# EAGLE board Bio-belt_SMD (EAGLE 5.06)
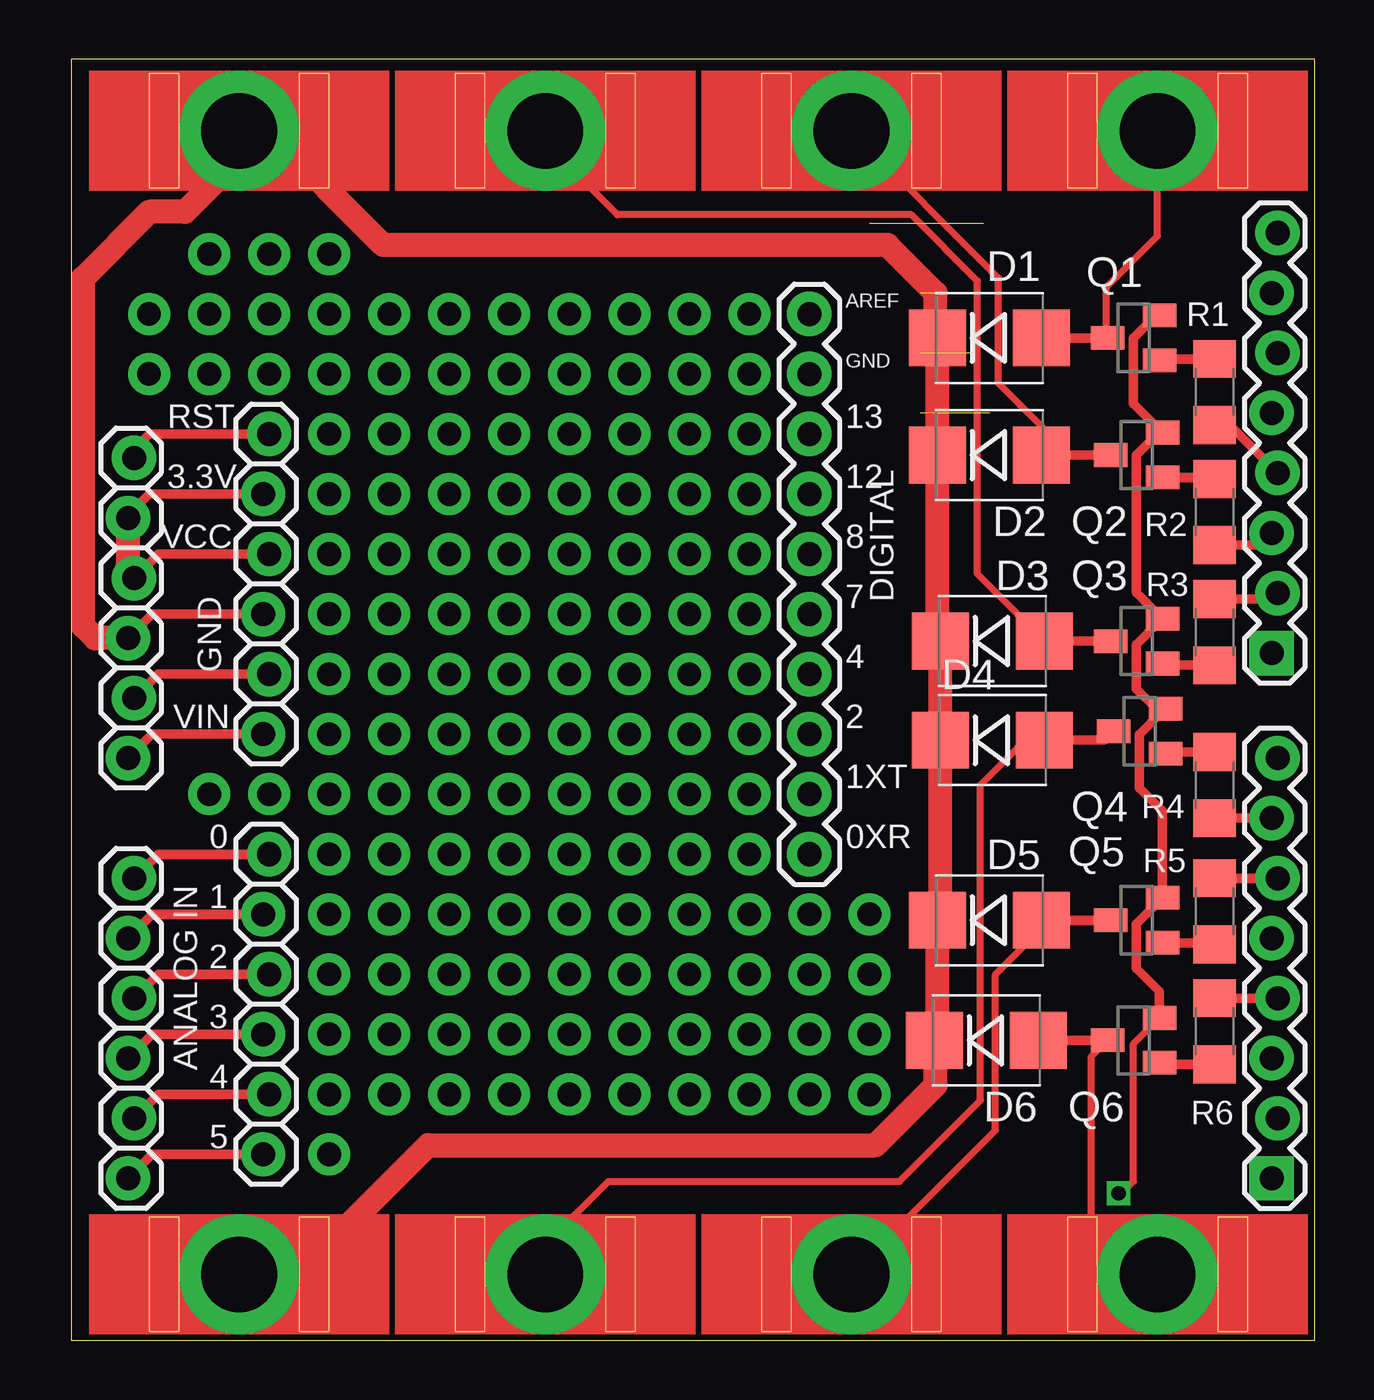
[diagram p0: board, top side]
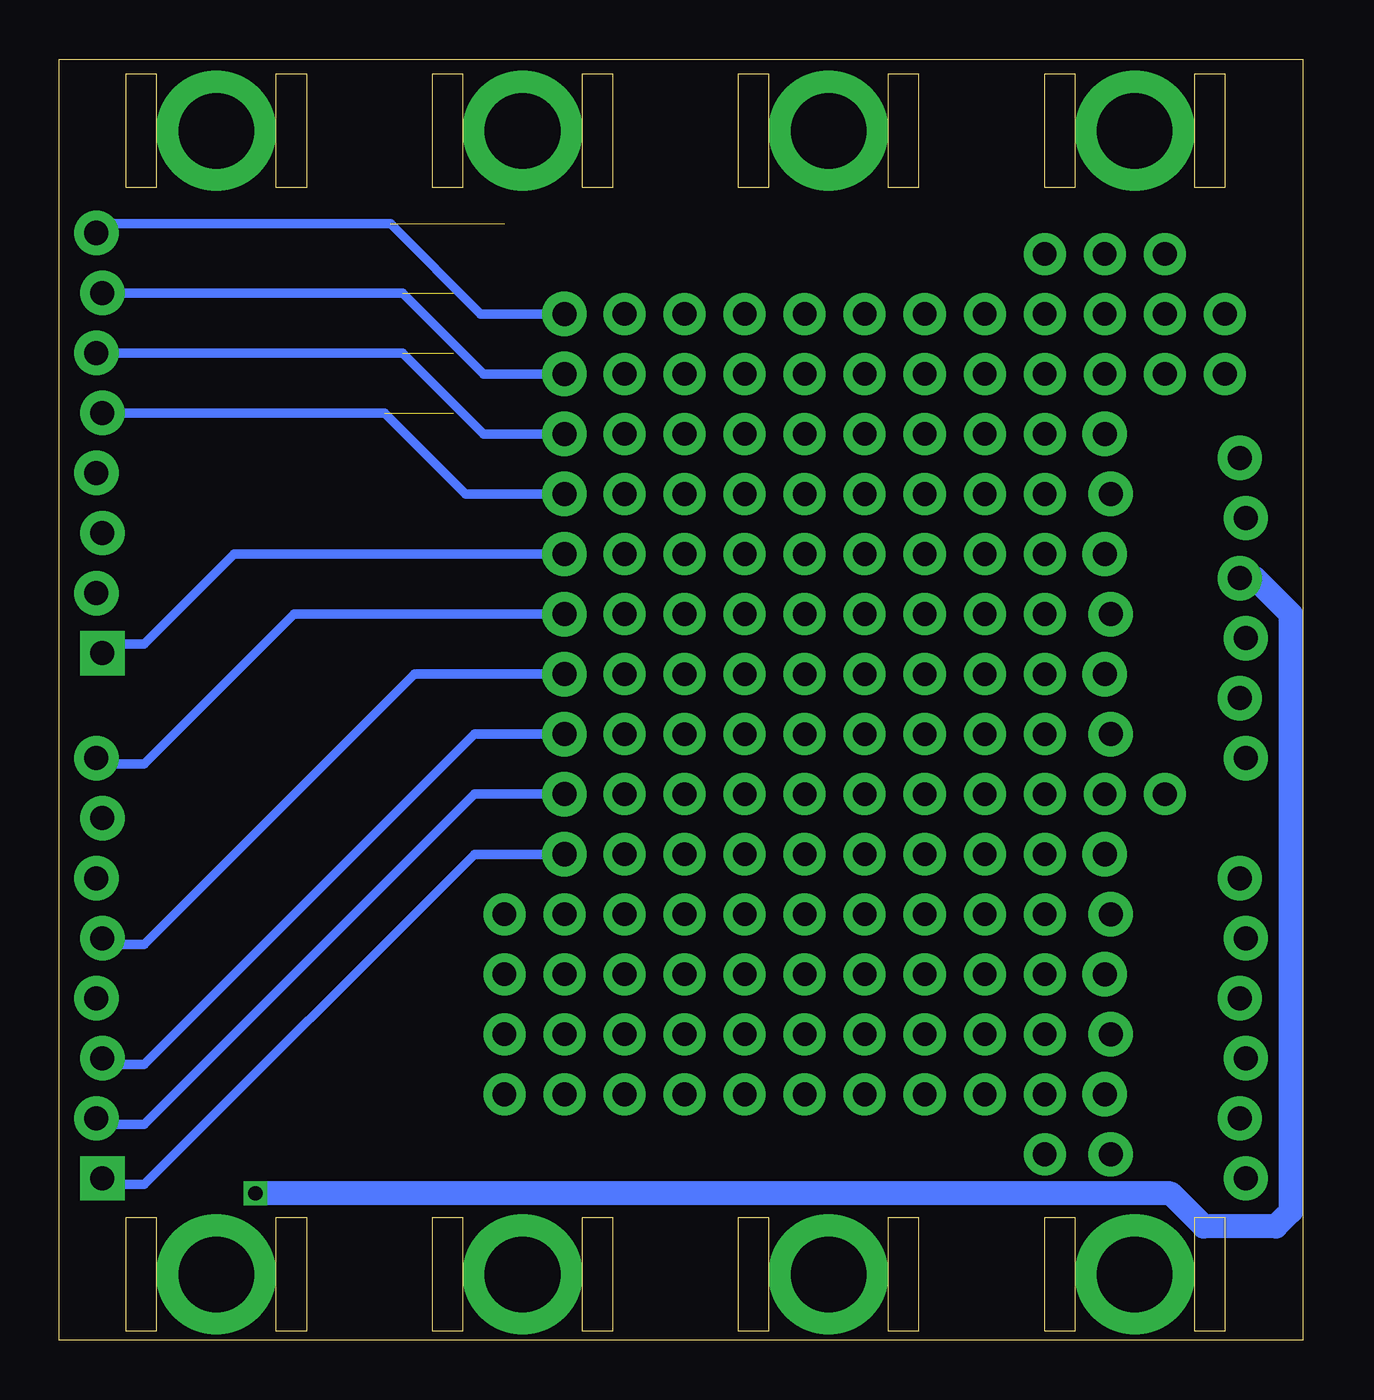
[diagram p1: board, bottom side, seen from below]

Size 52.63 x 54.22 mm. Coordinates in mm from the lower left corner, seen from the top.
Outline: 0,0 52.63,0 52.63,54.22 0,54.22 0,0
Copper layers (1*16): Top 0.035mm / dielectric 1.5mm / Bottom 0.035mm
Design rules "default": minimum track width 10mil, minimum drill 24mil, track to track 8mil, track to pad 8mil, pad to pad 8mil, via to via 8mil, smd to smd 8mil, copper to edge 40mil, drill to drill 8mil, minimum pad ring 10mil, minimum via ring 8mil, stop-mask expansion 4mil, vias tented up to drill 0mil, thermal gap 10mil

## Footprints (pad centres in the part's own frame; a part is rotated, then mirrored left to right if it is on the bottom)
SMB-DIODE = smd 2.4 x 2.4: A 2.2,0; C -2.2,0
1X06_LOCK = drill 1.016 pad 1.88 round: 1 0,0; 2 2.54,-0.254; 3 5.08,0; 4 7.62,-0.254; 5 10.16,0; 6 12.7,-0.254
1X10 = drill 1.016 pad 1.88 round: 1 0,0; 2 2.54,0; 3 5.08,0; 4 7.62,0; 5 10.16,0; 6 12.7,0; 7 15.24,0; 8 17.78,0; 9 20.32,0; 10 22.86,0
1X08_LOCK = drill 1.016 pad 1.88 square: 1 0,0.127 | drill 1.016 pad 1.88 round: 2 2.54,-0.127; 3 5.08,0.127; 4 7.62,-0.127; 5 10.16,0.127; 6 12.7,-0.127; 7 15.24,0.127; 8 17.78,-0.127
SOT23 = smd 1 x 1.4: 1 -0.95,-1.1; 2 0.95,-1.1; 3 0,1.1
1206 = smd 1.6 x 1.8: 1 -1.4,0; 2 1.4,0
SN1X01 = drill 3.2 pad 5.08 round: P$5 0,0

## Placement (x,y rotation side)
D1  [SMB-DIODE]  38.86,42.42 0 top
D2  [SMB-DIODE]  38.86,37.47 0 top
D3  [SMB-DIODE]  38.99,29.59 0 top
D4  [SMB-DIODE]  38.99,25.4 0 top
D5  [SMB-DIODE]  38.86,17.78 0 top
D6  [SMB-DIODE]  38.73,12.7 0 top
JP1  [1X06_LOCK]  8.38,38.35 270 top
JP2  M10"  [1X10]  31.24,20.57 90 top
JP3  [1X06_LOCK]  2.67,37.34 270 top
JP4  [1X06_LOCK]  2.67,19.56 270 top
JP5  [1X08_LOCK]  50.93,29.08 90 top
JP6  [1X08_LOCK]  50.93,6.86 90 top
JP7  [1X06_LOCK]  8.38,20.57 270 top
Q1  [SOT23]  44.96,42.42 90 top
Q2  [SOT23]  45.09,37.47 90 top
Q3  [SOT23]  45.09,29.59 90 top
Q4  [SOT23]  45.21,25.78 90 top
Q5  [SOT23]  45.09,17.78 90 top
Q6  [SOT23]  44.96,12.7 90 top
R1  [1206]  48.39,40.13 90 top
R2  [1206]  48.39,35.05 90 top
R3  [1206]  48.39,29.97 270 top
R4  [1206]  48.39,23.5 90 top
R5  [1206]  48.39,18.16 270 top
R6  [1206]  48.39,13.08 270 top
U$1  10MM_MAG_SNAP  [SN1X01]  45.97,51.18 90 top
U$2  10MM_MAG_SNAP  [SN1X01]  33.02,51.18 90 top
U$3  10MM_MAG_SNAP  [SN1X01]  20.07,51.18 90 top
U$4  10MM_MAG_SNAP  [SN1X01]  20.07,2.79 90 top
U$5  10MM_MAG_SNAP  [SN1X01]  33.02,2.79 90 top
U$6  10MM_MAG_SNAP  [SN1X01]  45.97,2.79 90 top
U$7  10MM_MAG_SNAP  [SN1X01]  7.11,2.79 90 top
U$8  10MM_MAG_SNAP  [SN1X01]  7.11,51.18 90 top
U$9  [SHOCK_LOGO]  46.48,35.31 0 bottom
U$10  [PS1_LOGO]  47.24,24.13 0 bottom

## Library data of the parts
D1-D6 JP1-JP7 R1-R6 U$1-U$8 = SparkFun
Q1-Q6 = semicon-smd-ipc
U$9 U$10 = PumpingStation-One

## Nets
GND: JP1.2 JP1.3 JP3.2 JP3.3 Q1.2 Q2.2 Q3.2 Q4.2 Q5.2 Q6.2
N$1: D1.A Q1.3 U$1.P$5
N$2: D2.A Q2.3 U$2.P$5
N$3: D3.A Q3.3 U$3.P$5
N$4: D4.A Q4.3 U$4.P$5
N$5: D5.A Q5.3 U$5.P$5
N$6: D6.A Q6.3 U$6.P$5
N$8: Q1.1 R1.2
N$9: Q2.1 R2.2
N$10: Q3.1 R3.2
N$11: Q4.1 R4.2
N$12: Q5.1 R5.2
N$13: Q6.1 R6.2
N$14: JP5.4 R1.1
N$15: JP5.3 R2.1
N$16: JP5.2 R3.1
N$17: JP6.7 R4.1
N$18: JP6.6 R5.1
N$19: JP6.4 R6.1
N$179: JP2.10 JP5.8
N$180: JP2.9 JP5.7
N$181: JP2.8 JP5.6
N$182: JP2.7 JP5.5
N$183: JP2.6 JP5.1
N$184: JP2.5 JP6.8
N$185: JP2.4 JP6.5
N$191: JP2.3 JP6.3
N$192: JP2.2 JP6.2
N$193: JP2.1 JP6.1
N$194: JP1.6 JP3.6
N$195: JP1.5 JP3.5
N$196: JP1.1 JP3.1
N$197: JP4.6 JP7.6
N$198: JP4.5 JP7.5
N$199: JP4.4 JP7.4
N$200: JP4.3 JP7.3
N$201: JP4.2 JP7.2
N$202: JP4.1 JP7.1
VCC: D1.C D2.C D3.C D4.C D5.C D6.C JP1.4 JP3.4 U$7.P$5 U$8.P$5

## Tracks (layer width: path | path; a pad name or v marks a point on that pad's centre or on a via)
GND  (via drill 0.6)
  Top 0.305: v44.32,6.22 44.45,6.22 44.96,6.73 44.96,12.55 Q6.2
  Top 0.406: Q6.2 46.06,14.78 45.09,15.75 45.09,17.63 Q5.2 46.19,22.39 45.21,23.37 45.21,25.63 Q4.2 45.91,26.73 45.09,27.56 45.09,29.44 Q3.2 45.09,31.64 45.09,37.47 46.03,38.41 Q2.2 44.96,39.64 44.96,42.42 45.91,43.37 Q1.2 | JP3.2 2.41,34.92 3.3,35.81 JP1.2 | JP1.3 3.68,33.27 JP3.3
  Top 1.016: JP3.2 2.41,32.51 JP3.3
  Bottom 1.016: JP3.3 2.03,32.26 0.51,30.73 0.51,5.46 1.14,4.83 4.19,4.83 5.59,6.22 v44.32,6.22
N$1
  Top 0.305: U$1.P$5 45.97,46.74 43.81,44.58 43.81,42.46 Q1.3
  Top 0.406: D1.A Q1.3
N$2
  Top 0.305: D2.A 41.06,38.69 39.24,40.51 39.24,44.96 U$2.P$5
  Top 0.406: D2.A Q2.3
N$3
  Top 0.305: U$3.P$5 20.07,50.67 23.11,47.62 35.56,47.62 38.35,44.83 38.35,32.43 D3.A
  Top 0.406: D3.A Q3.3
N$4
  Top 0.305: D4.A 40.39,25.4 38.48,23.5 38.48,10.16 35.05,6.73 22.73,6.73 20.07,4.06 U$4.P$5
  Top 0.406: D4.A 43.73,25.4 Q4.3
N$5
  Top 0.305: D5.A 41.06,17.44 39.12,15.49 39.12,8.89 U$5.P$5
  Top 0.406: D5.A Q5.3
N$6
  Top 0.305: U$6.P$5 44.7,2.79 43.18,4.32 43.18,12.02 Q6.3
  Top 0.406: Q6.3 D6.A
N$8
  Top 0.406: R1.2 46.12,41.53 Q1.1
N$9
  Top 0.406: Q2.1 48.32,36.52 R2.2
N$10
  Top 0.406: R3.2 46.25,28.57 Q3.1
N$11
  Top 0.406: R4.2 46.38,24.89 Q4.1
N$12
  Top 0.406: Q5.1 48.32,16.83 R5.2
N$13
  Top 0.406: R6.2 46.13,11.68 Q6.1
N$14
  Top 0.406: R1.1 49.02,38.73 JP5.4
N$15
  Top 0.406: R2.1 50.29,33.65 JP5.3
N$16
  Top 0.406: R3.1 50.8,31.37 JP5.2
N$17
  Top 0.406: JP6.7 R4.1
N$18
  Top 0.406: JP6.6 R5.1
N$19
  Top 0.406: JP6.4 R6.1
N$20  (via drill 1 pad 1.78)
  other vias: 8.38,43.43
N$21  (via drill 1 pad 1.78)
  other vias: 10.92,43.43
N$25  (via drill 1 pad 1.78)
  other vias: 5.84,23.11
N$33  (via drill 1 pad 1.78)
  other vias: 10.92,7.87
N$34  (via drill 1 pad 1.78)
  other vias: 5.84,40.89
N$35  (via drill 1 pad 1.78)
  other vias: 3.3,40.89
N$36  (via drill 1 pad 1.78)
  other vias: 3.3,43.43
N$37  (via drill 1 pad 1.78)
  other vias: 5.84,43.43
N$38  (via drill 1 pad 1.78)
  other vias: 5.84,45.97
N$45  (via drill 1 pad 1.78)
  other vias: 8.38,23.11
N$51  (via drill 1 pad 1.78)
  other vias: 8.38,40.89
N$52  (via drill 1 pad 1.78)
  other vias: 8.38,45.97
N$53  (via drill 1 pad 1.78)
  other vias: 10.92,38.35
N$54  (via drill 1 pad 1.78)
  other vias: 10.92,35.81
N$55  (via drill 1 pad 1.78)
  other vias: 10.92,33.27
N$56  (via drill 1 pad 1.78)
  other vias: 10.92,30.73
N$57  (via drill 1 pad 1.78)
  other vias: 10.92,28.19
N$58  (via drill 1 pad 1.78)
  other vias: 10.92,25.65
N$59  (via drill 1 pad 1.78)
  other vias: 10.92,23.11
N$60  (via drill 1 pad 1.78)
  other vias: 10.92,20.57
N$61  (via drill 1 pad 1.78)
  other vias: 10.92,18.03
N$62  (via drill 1 pad 1.78)
  other vias: 10.92,15.49
N$63  (via drill 1 pad 1.78)
  other vias: 10.92,12.95
N$64  (via drill 1 pad 1.78)
  other vias: 10.92,10.41
N$65  (via drill 1 pad 1.78)
  other vias: 10.92,40.89
N$66  (via drill 1 pad 1.78)
  other vias: 10.92,45.97
N$67  (via drill 1 pad 1.78)
  other vias: 13.46,38.35
N$68  (via drill 1 pad 1.78)
  other vias: 13.46,35.81
N$69  (via drill 1 pad 1.78)
  other vias: 13.46,33.27
N$70  (via drill 1 pad 1.78)
  other vias: 13.46,30.73
N$71  (via drill 1 pad 1.78)
  other vias: 13.46,28.19
N$72  (via drill 1 pad 1.78)
  other vias: 13.46,25.65
N$73  (via drill 1 pad 1.78)
  other vias: 13.46,23.11
N$74  (via drill 1 pad 1.78)
  other vias: 13.46,20.57
N$75  (via drill 1 pad 1.78)
  other vias: 13.46,18.03
N$76  (via drill 1 pad 1.78)
  other vias: 13.46,15.49
N$77  (via drill 1 pad 1.78)
  other vias: 13.46,12.95
N$78  (via drill 1 pad 1.78)
  other vias: 13.46,10.41
N$79  (via drill 1 pad 1.78)
  other vias: 13.46,40.89
N$80  (via drill 1 pad 1.78)
  other vias: 13.46,43.43
N$81  (via drill 1 pad 1.78)
  other vias: 16,38.35
N$82  (via drill 1 pad 1.78)
  other vias: 16,35.81
N$83  (via drill 1 pad 1.78)
  other vias: 16,33.27
N$84  (via drill 1 pad 1.78)
  other vias: 16,30.73
N$85  (via drill 1 pad 1.78)
  other vias: 16,28.19
N$86  (via drill 1 pad 1.78)
  other vias: 16,25.65
N$87  (via drill 1 pad 1.78)
  other vias: 16,23.11
N$88  (via drill 1 pad 1.78)
  other vias: 16,20.57
N$89  (via drill 1 pad 1.78)
  other vias: 16,18.03
N$90  (via drill 1 pad 1.78)
  other vias: 16,15.49
N$91  (via drill 1 pad 1.78)
  other vias: 16,12.95
N$92  (via drill 1 pad 1.78)
  other vias: 16,10.41
N$93  (via drill 1 pad 1.78)
  other vias: 16,40.89
N$94  (via drill 1 pad 1.78)
  other vias: 16,43.43
N$95  (via drill 1 pad 1.78)
  other vias: 18.54,38.35
N$96  (via drill 1 pad 1.78)
  other vias: 18.54,35.81
N$97  (via drill 1 pad 1.78)
  other vias: 18.54,33.27
N$98  (via drill 1 pad 1.78)
  other vias: 18.54,30.73
N$99  (via drill 1 pad 1.78)
  other vias: 18.54,28.19
N$100  (via drill 1 pad 1.78)
  other vias: 18.54,25.65
N$101  (via drill 1 pad 1.78)
  other vias: 18.54,23.11
N$102  (via drill 1 pad 1.78)
  other vias: 18.54,20.57
N$103  (via drill 1 pad 1.78)
  other vias: 18.54,18.03
N$104  (via drill 1 pad 1.78)
  other vias: 18.54,15.49
N$105  (via drill 1 pad 1.78)
  other vias: 18.54,12.95
N$106  (via drill 1 pad 1.78)
  other vias: 18.54,10.41
N$107  (via drill 1 pad 1.78)
  other vias: 18.54,40.89
N$108  (via drill 1 pad 1.78)
  other vias: 18.54,43.43
N$109  (via drill 1 pad 1.78)
  other vias: 21.08,38.35
N$110  (via drill 1 pad 1.78)
  other vias: 21.08,35.81
N$111  (via drill 1 pad 1.78)
  other vias: 21.08,33.27
N$112  (via drill 1 pad 1.78)
  other vias: 21.08,30.73
N$113  (via drill 1 pad 1.78)
  other vias: 21.08,28.19
N$114  (via drill 1 pad 1.78)
  other vias: 21.08,25.65
N$115  (via drill 1 pad 1.78)
  other vias: 21.08,23.11
N$116  (via drill 1 pad 1.78)
  other vias: 21.08,20.57
N$117  (via drill 1 pad 1.78)
  other vias: 21.08,18.03
N$118  (via drill 1 pad 1.78)
  other vias: 21.08,15.49
N$119  (via drill 1 pad 1.78)
  other vias: 21.08,12.95
N$120  (via drill 1 pad 1.78)
  other vias: 21.08,10.41
N$121  (via drill 1 pad 1.78)
  other vias: 21.08,40.89
N$122  (via drill 1 pad 1.78)
  other vias: 21.08,43.43
N$123  (via drill 1 pad 1.78)
  other vias: 23.62,38.35
N$124  (via drill 1 pad 1.78)
  other vias: 23.62,35.81
N$125  (via drill 1 pad 1.78)
  other vias: 23.62,33.27
N$126  (via drill 1 pad 1.78)
  other vias: 23.62,30.73
N$127  (via drill 1 pad 1.78)
  other vias: 23.62,28.19
N$128  (via drill 1 pad 1.78)
  other vias: 23.62,25.65
N$129  (via drill 1 pad 1.78)
  other vias: 23.62,23.11
N$130  (via drill 1 pad 1.78)
  other vias: 23.62,20.57
N$131  (via drill 1 pad 1.78)
  other vias: 23.62,18.03
N$132  (via drill 1 pad 1.78)
  other vias: 23.62,15.49
N$133  (via drill 1 pad 1.78)
  other vias: 23.62,12.95
N$134  (via drill 1 pad 1.78)
  other vias: 23.62,10.41
N$135  (via drill 1 pad 1.78)
  other vias: 23.62,40.89
N$136  (via drill 1 pad 1.78)
  other vias: 23.62,43.43
N$137  (via drill 1 pad 1.78)
  other vias: 26.16,38.35
N$138  (via drill 1 pad 1.78)
  other vias: 26.16,35.81
N$139  (via drill 1 pad 1.78)
  other vias: 26.16,33.27
N$140  (via drill 1 pad 1.78)
  other vias: 26.16,30.73
N$141  (via drill 1 pad 1.78)
  other vias: 26.16,28.19
N$142  (via drill 1 pad 1.78)
  other vias: 26.16,25.65
N$143  (via drill 1 pad 1.78)
  other vias: 26.16,23.11
N$144  (via drill 1 pad 1.78)
  other vias: 26.16,20.57
N$145  (via drill 1 pad 1.78)
  other vias: 26.16,18.03
N$146  (via drill 1 pad 1.78)
  other vias: 26.16,15.49
N$147  (via drill 1 pad 1.78)
  other vias: 26.16,12.95
N$148  (via drill 1 pad 1.78)
  other vias: 26.16,10.41
N$149  (via drill 1 pad 1.78)
  other vias: 26.16,40.89
N$150  (via drill 1 pad 1.78)
  other vias: 26.16,43.43
N$151  (via drill 1 pad 1.78)
  other vias: 28.7,38.35
N$152  (via drill 1 pad 1.78)
  other vias: 28.7,35.81
N$153  (via drill 1 pad 1.78)
  other vias: 28.7,33.27
N$154  (via drill 1 pad 1.78)
  other vias: 28.7,30.73
N$155  (via drill 1 pad 1.78)
  other vias: 28.7,28.19
N$156  (via drill 1 pad 1.78)
  other vias: 28.7,25.65
N$157  (via drill 1 pad 1.78)
  other vias: 28.7,23.11
N$158  (via drill 1 pad 1.78)
  other vias: 28.7,20.57
N$159  (via drill 1 pad 1.78)
  other vias: 28.7,18.03
N$160  (via drill 1 pad 1.78)
  other vias: 28.7,15.49
N$161  (via drill 1 pad 1.78)
  other vias: 28.7,12.95
N$162  (via drill 1 pad 1.78)
  other vias: 28.7,10.41
N$163  (via drill 1 pad 1.78)
  other vias: 28.7,40.89
N$164  (via drill 1 pad 1.78)
  other vias: 28.7,43.43
N$173  (via drill 1 pad 1.78)
  other vias: 31.24,18.03
N$174  (via drill 1 pad 1.78)
  other vias: 31.24,15.49
N$175  (via drill 1 pad 1.78)
  other vias: 31.24,12.95
N$176  (via drill 1 pad 1.78)
  other vias: 31.24,10.41
N$179  (1 unrouted)
  Bottom 0.406: JP5.8 50.67,47.24 38.61,47.24 34.8,43.43 JP2.10
N$180  (1 unrouted)
  Bottom 0.406: JP5.7 38.1,44.32 34.67,40.89 JP2.9
N$181  (1 unrouted)
  Bottom 0.406: JP5.6 38.1,41.78 34.67,38.35 JP2.8
N$182  (1 unrouted)
  Bottom 0.406: JP5.5 38.86,39.24 35.43,35.81 JP2.7
N$183
  Bottom 0.406: JP2.6 45.21,33.27 49.02,29.46 50.42,29.46 JP5.1
N$184
  Bottom 0.406: JP2.5 42.67,30.73 49.02,24.38 50.8,24.38 JP6.8
N$185
  Bottom 0.406: JP2.4 37.59,28.19 49.02,16.76 50.55,16.76 JP6.5
N$187  (via drill 1 pad 1.78)
  other vias: 33.78,18.03
N$188  (via drill 1 pad 1.78)
  other vias: 33.78,15.49
N$189  (via drill 1 pad 1.78)
  other vias: 33.78,12.95
N$190  (via drill 1 pad 1.78)
  other vias: 33.78,10.41
N$191
  Bottom 0.406: JP2.3 35.05,25.65 49.02,11.68 50.55,11.68 JP6.3
N$192
  Bottom 0.406: JP2.2 35.05,23.11 49.02,9.14 50.8,9.14 JP6.2
N$193
  Bottom 0.406: JP2.1 35.05,20.57 49.02,6.6 50.55,6.6 JP6.1
N$194
  Top 0.406: JP1.6 3.43,25.65 JP3.6
N$195
  Top 0.406: JP1.5 3.68,28.19 JP3.5
N$196
  Top 0.406: JP3.1 2.67,37.72 3.3,38.35 JP1.1
N$197
  Top 0.406: JP7.6 3.43,7.87 JP4.6
N$198
  Top 0.406: JP7.5 3.68,10.41 JP4.5
N$199
  Top 0.406: JP7.4 3.43,12.95 JP4.4
N$200
  Top 0.406: JP7.3 3.68,15.49 JP4.3
N$201
  Top 0.406: JP7.2 3.43,18.03 JP4.2
N$202
  Top 0.406: JP7.1 3.68,20.57 JP4.1
VCC
  Top 0.406: JP1.4 3.43,30.73 JP3.4
  Top 1.016: U$7.P$5 9.65,2.79 15.11,8.26 34.04,8.26 36.58,10.79 36.58,12.66 D6.C 36.66,12.83 D5.C 36.79,17.91 D4.C D3.C 36.66,29.72 D2.C D1.C 36.58,42.5 36.58,44.32 34.54,46.35 13.21,46.35 8.38,51.18 U$8.P$5 6.99,51.05 6.6,51.05 6.6,49.53 4.83,47.75 3.3,47.75 0.51,44.96 0.51,30.23 1.02,29.72 JP3.4

## Text on the board
tNames: AREF | GND | RST | 13 | 3.3V | 12 | VCC | 8 | GND | 7 | DIGITAL | 4 | VIN | 2 | 1XT | 0 | 0XR | 1 | 2 | 3 | ANALOG IN | 4 | 5
200bmp: Designed By: Jeff Kantarek
208bmp: http://affectiveengineering.com